# Altium PCB PCB_smart.PcbDoc
Units mm, origin at the board's own origin, x right, y up, seen from the top; angles counter-clockwise.
Board outline 80 x 80 mm, 4 copper layers (Top Layer, Internal Plane 1, Internal Plane 2, Bottom Layer), stack 0.462 mm thick; 30 components, 20 nets, 206 pads, 13 vias.
Unrouted connection lines stored in the file: 81.
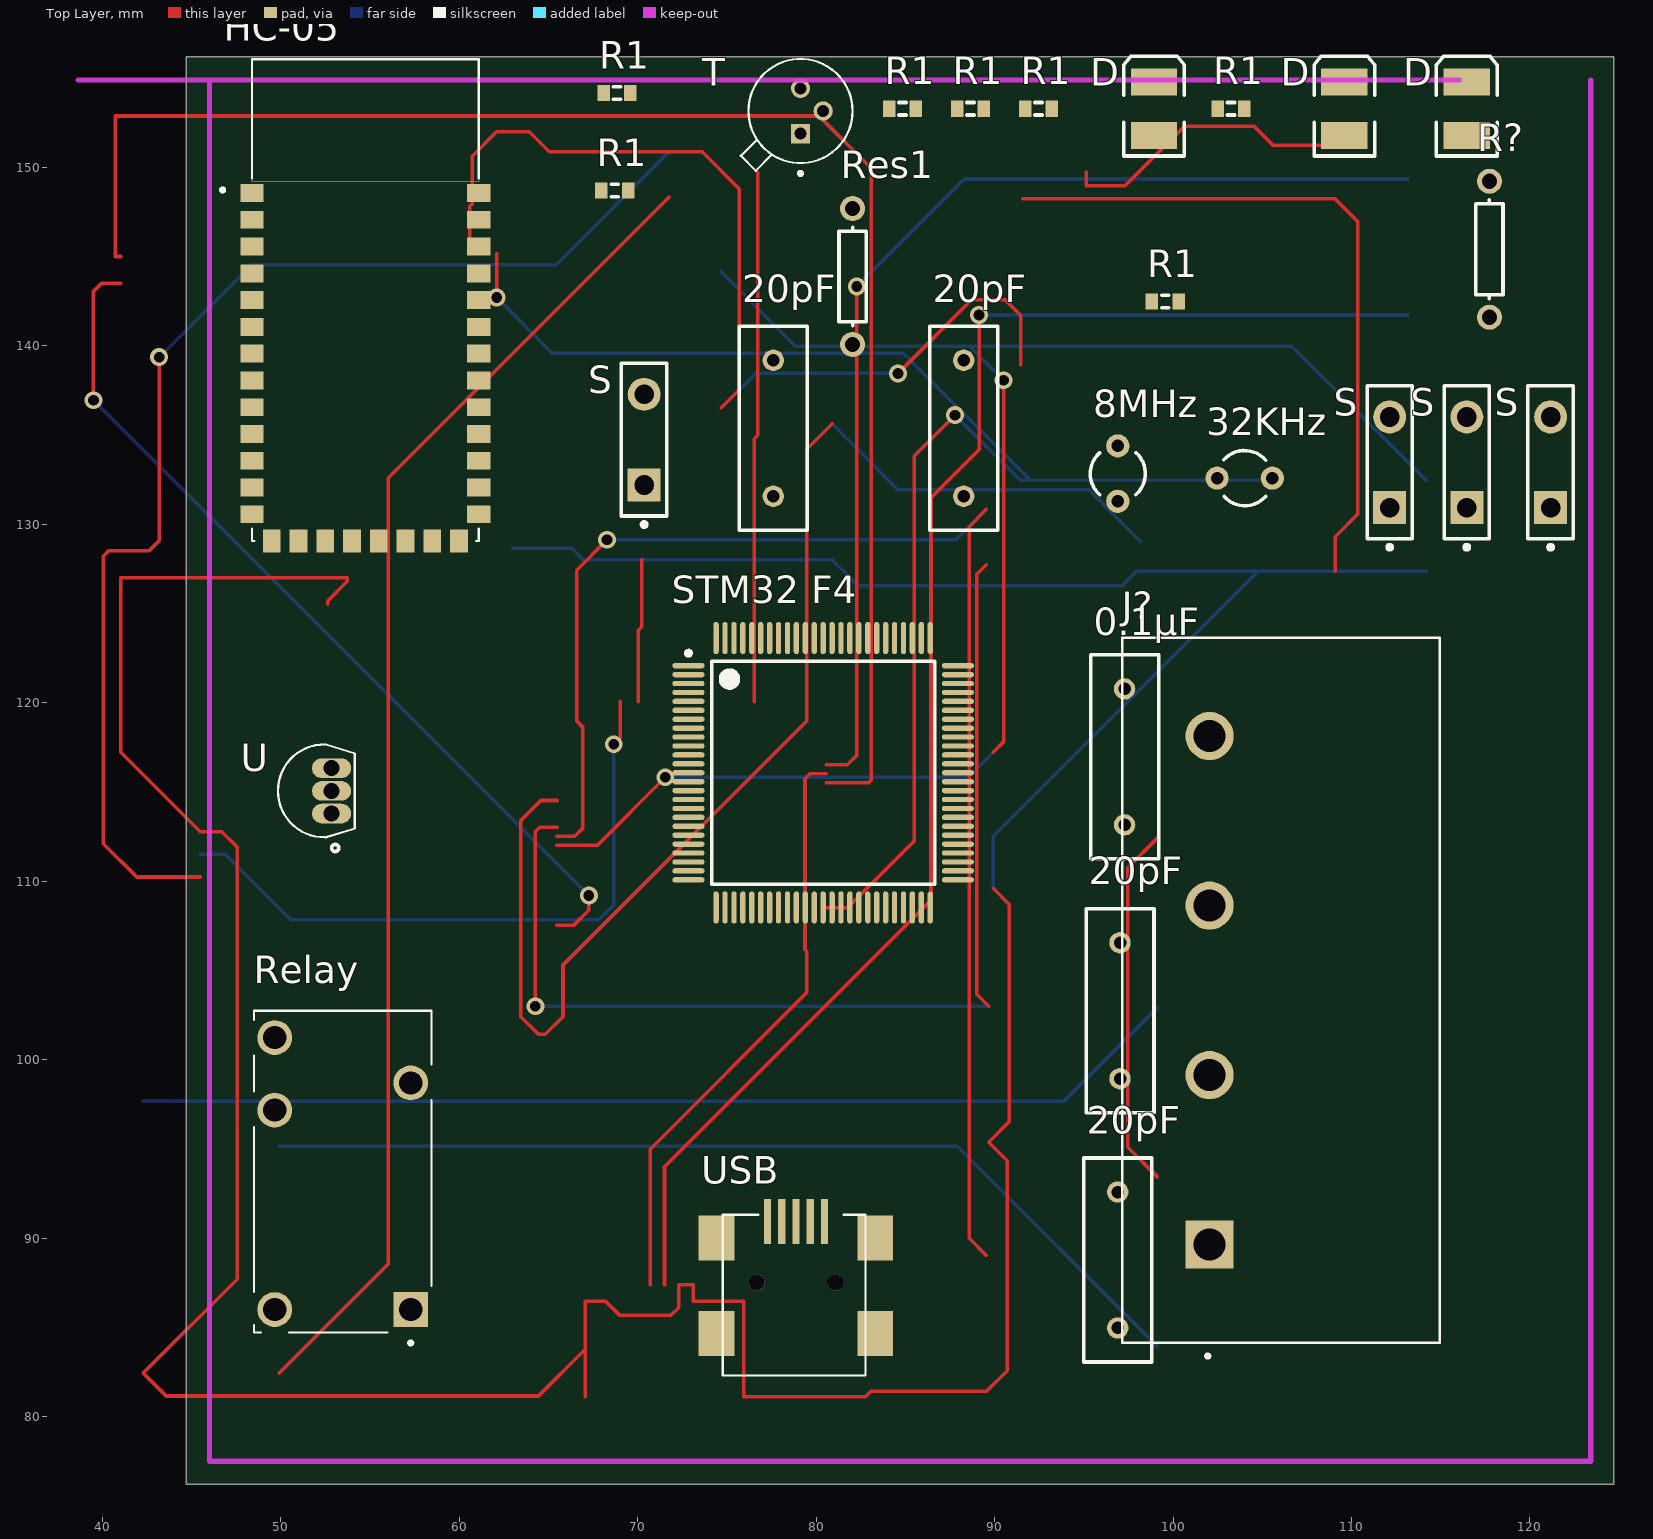
[diagram p0: Top Layer view]
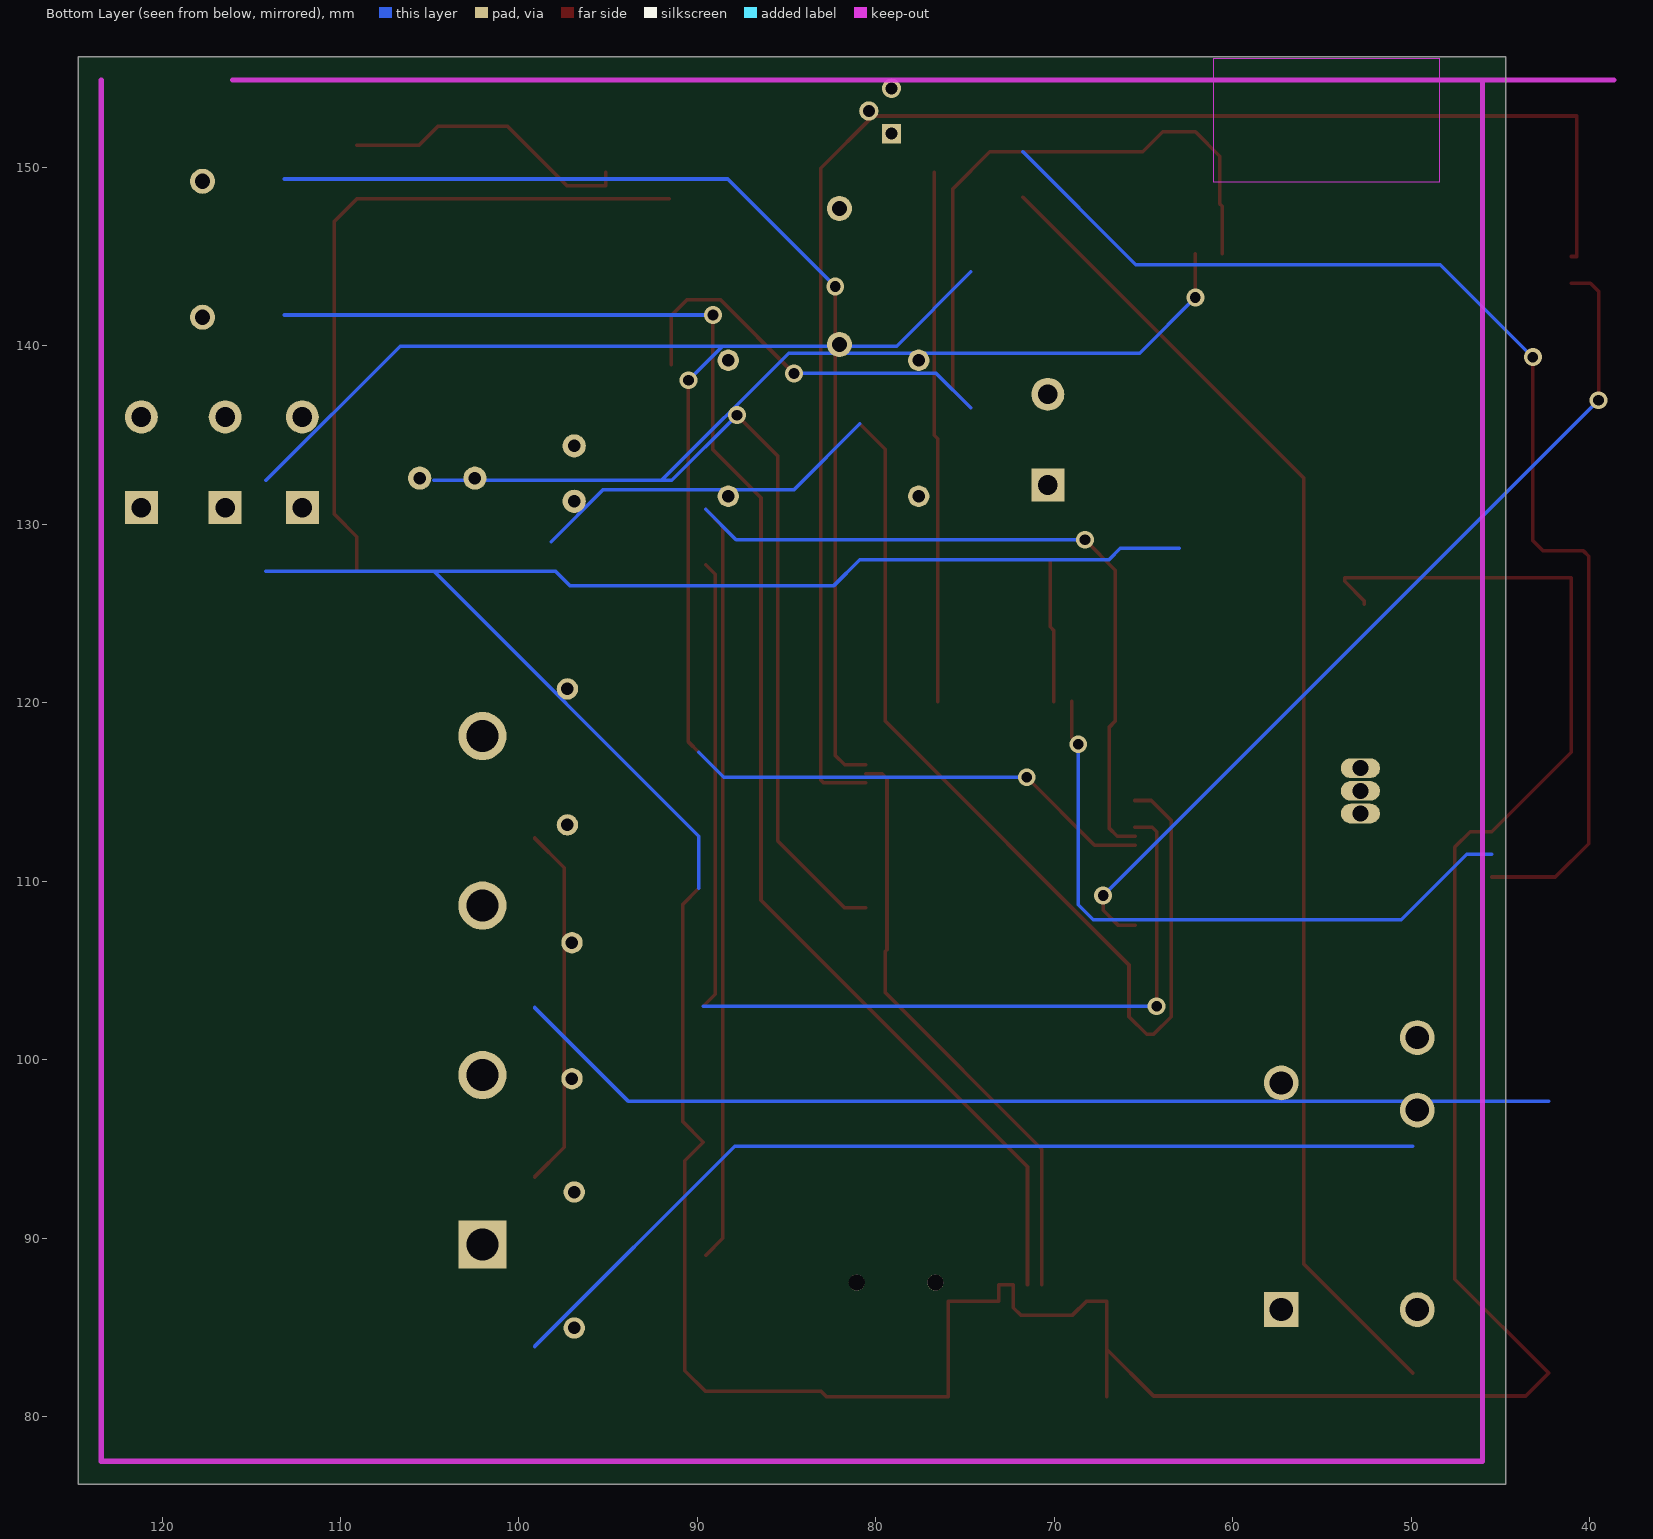
[diagram p1: Bottom Layer view, seen from below]
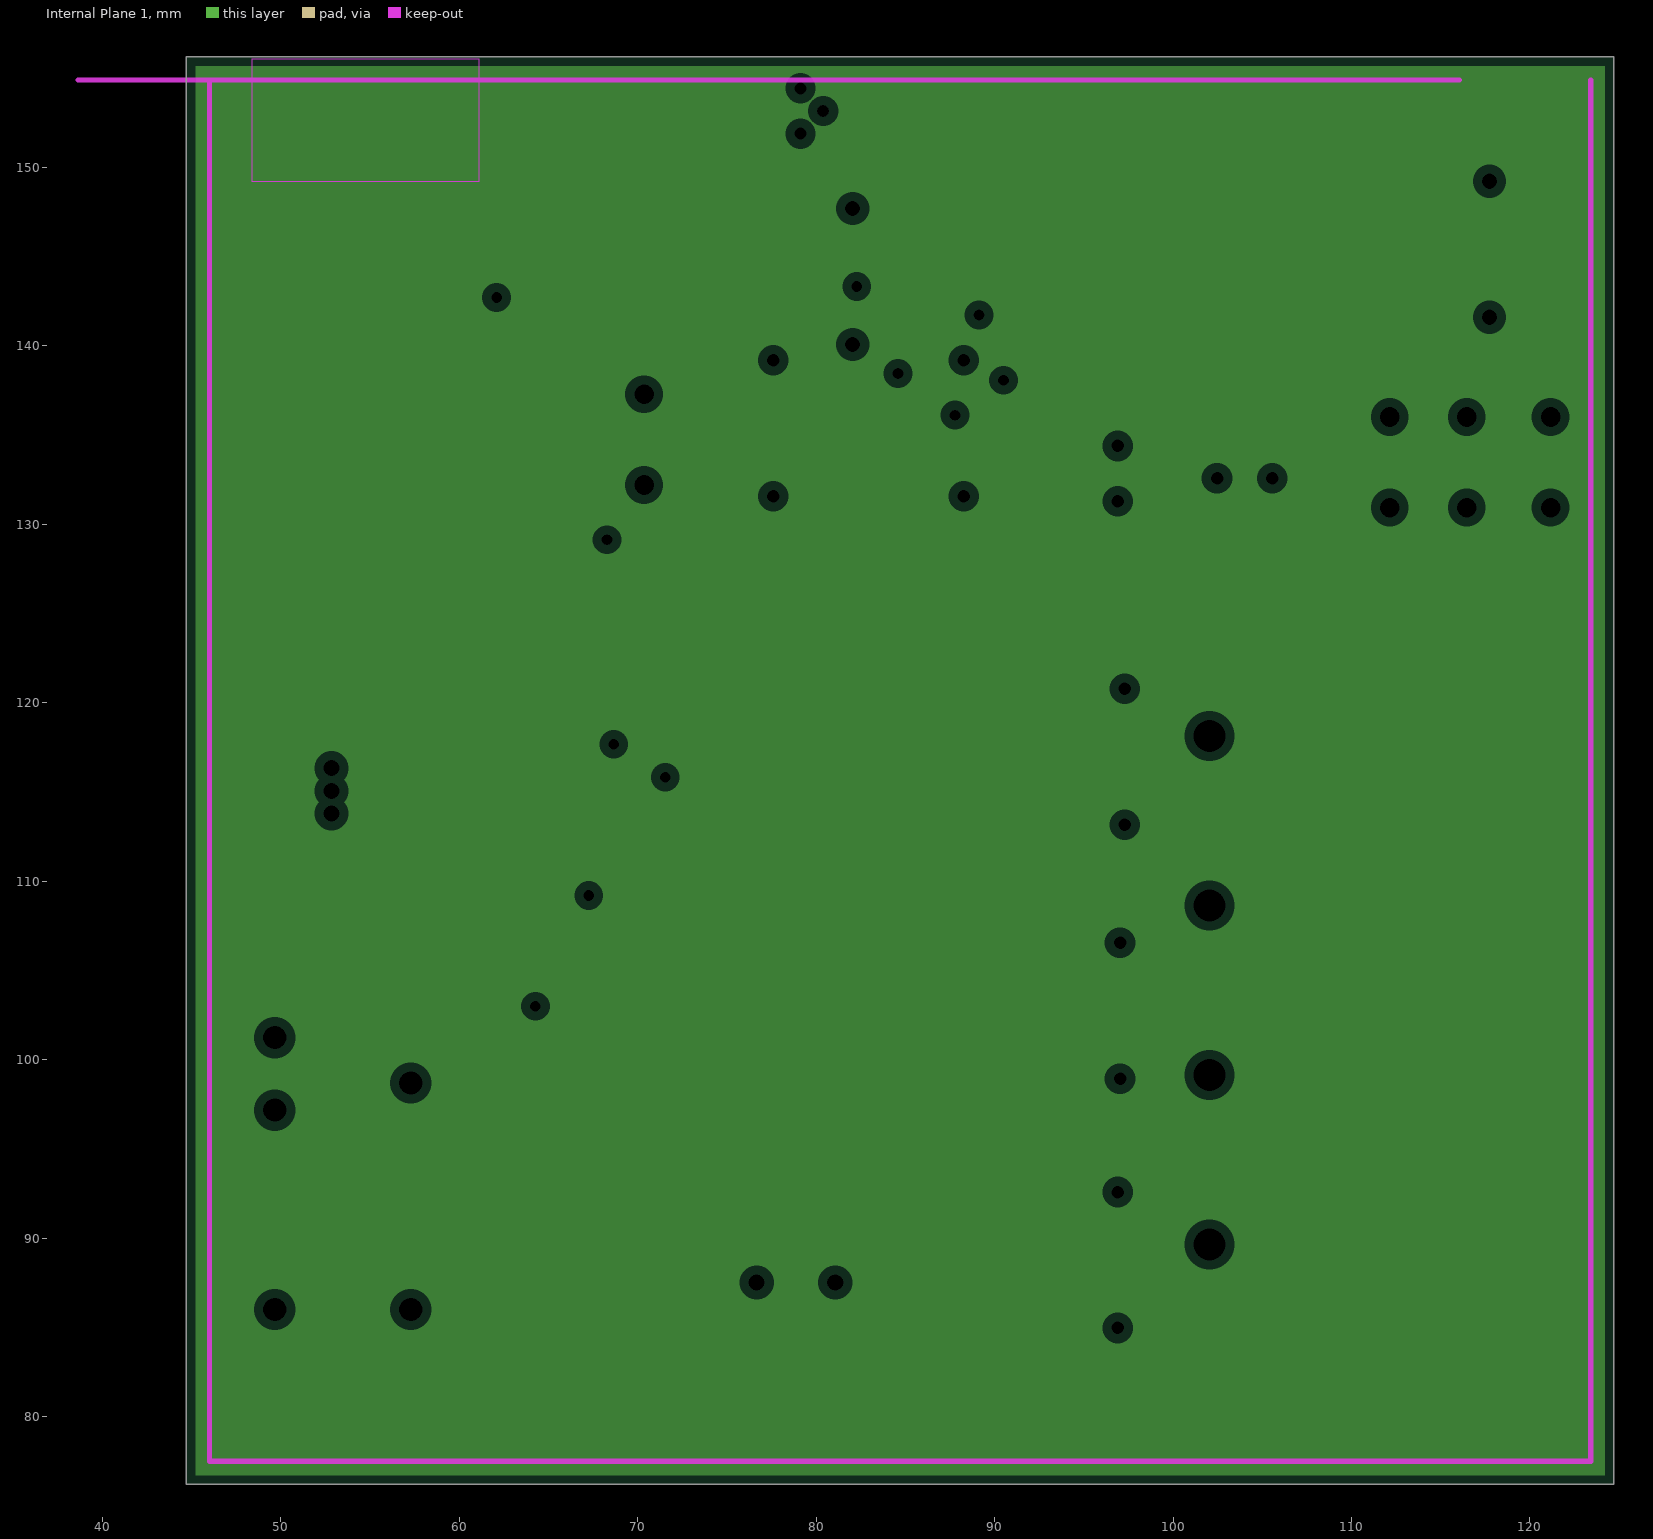
[diagram p2: Internal Plane 1, clearances drawn from the general rule]
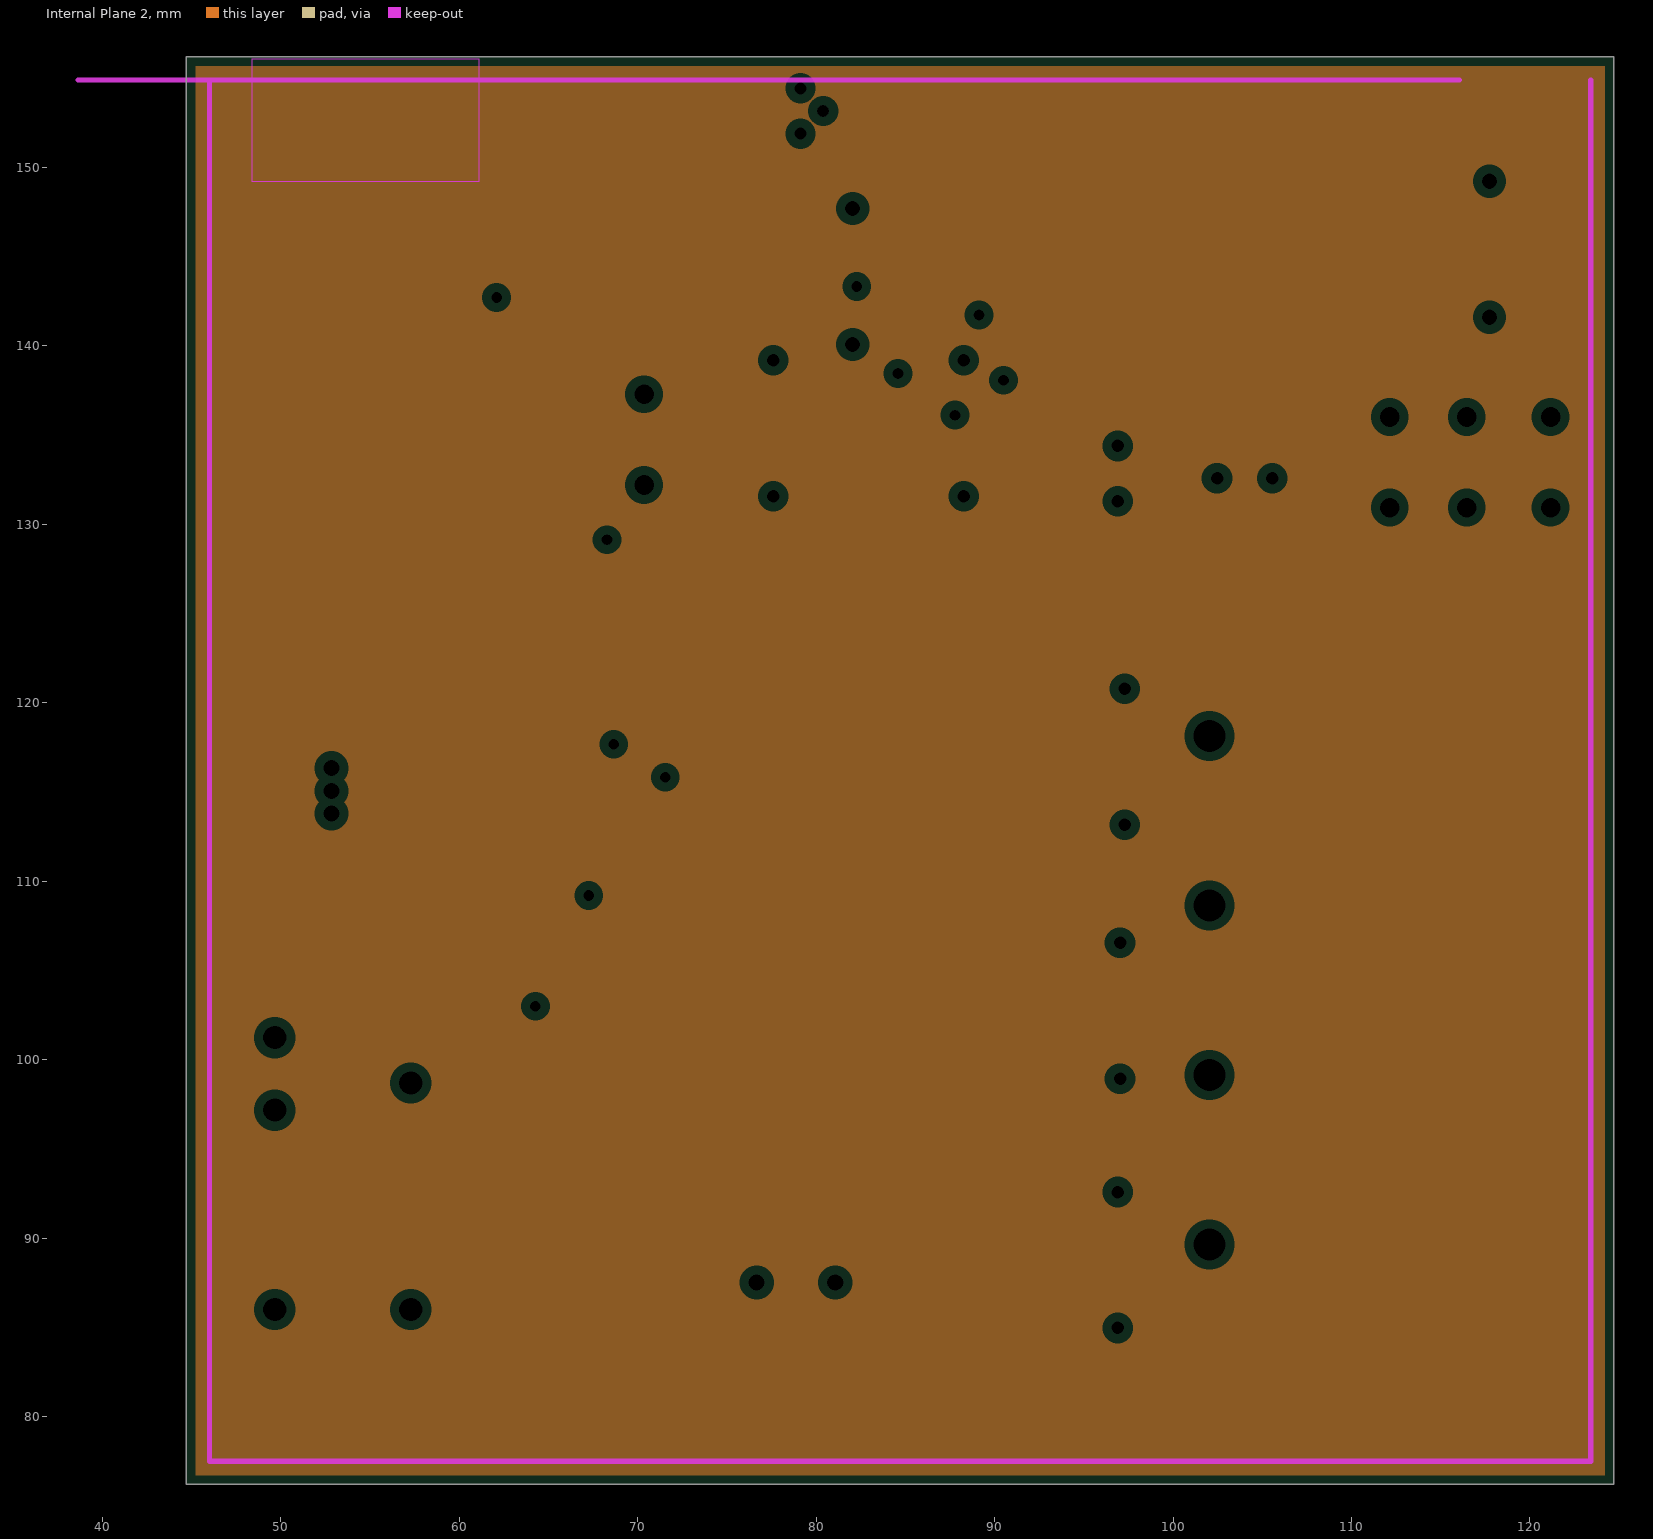
[diagram p3: Internal Plane 2, clearances drawn from the general rule]

## Layer stack, top to bottom
Top Solder: solder mask 0.0102, Solder Resist, Dk 3.5
Top Layer: signal copper 0.0356
Internal Plane 1: plane copper 0.0356
Internal Plane 2: plane copper 0.0356
Dielectric 1: dielectric 0.32, FR-4, Dk 4.8
Bottom Layer: signal copper 0.0356
Bottom Solder: solder mask 0.0102, Solder Resist, Dk 3.5

## Board outline
44.704,76.2 124.704,76.2 124.704,156.2 44.704,156.2

## Design rules (kind name [scope] priority, off if disabled: settings)
Clearance [All] p1: gap=0.2
PlaneClearance [All] p1: clearance=0.508
PlaneConnect [All] p1: planeconnectstyle=Relief reliefexpansion=0.508 reliefentries=4 reliefconductorwidth=0.254 reliefairgap=0.254
PolygonConnect [All] p1: connectstyle=Relief reliefconductorwidth=0.254 reliefentries=4 polygonreliefangle="90 Angle" airgapwidth=0.254
RoutingVias [All] p1: holewidth=0.6 width=1 viastyle="Through Hole" minholewidth=0.711 minwidth=1.27 maxholewidth=0.711 maxwidth=1.27
SolderMaskExpansion [All] p1: expansion=0.102
Width [All] p1: maxlimit=0.2 minlimit=0.2 preferedwidth=0.2
28 further rules are at their usual default settings.

## Classes and differential pairs
component class Sheet1: 0.1µF 8MHz 20pF 32KHz D HC-05 J? R1 R? Relay Res1 S "STM32 F4" T U U? USB

## Components (designator, comment, footprint, x,y, rotation, side; value= is the part's Value field where it differs from the comment)
0.1µF "C" RAD-0.3 97.282,116.967 r90 top
8MHz "XTAL" R38 96.901,132.842 r0 top
20pF "Cap" RAD-0.3 97.028,102.743 r90 top
20pF "Cap" RAD-0.3 96.901,88.773 r90 top
20pF "CL2" RAD-0.3 88.265,135.382 r90 top
20pF "CL1" RAD-0.3 77.597,135.382 r90 top
32KHz "OSCL" R38 104.013,132.588 r90 top
D "LED3" 3.5X2.8X1.9 116.459,153.289 r90 top
D "LED3" 3.5X2.8X1.9 109.601,153.289 r90 top
D "LED3" 3.5X2.8X1.9 98.933,153.289 r90 top
HC-05 "HC-05" XCVR_HC-05 54.737,142.24 r0 top
J? "OSTYK44104030" OST_OSTYK44104030 106.045,103.886 r90 top
R1 "Res3" J1-0603 84.836,153.289 r0 top
R1 "Res3" J1-0603 103.251,153.289 r0 top
R1 "Res3" J1-0603 92.456,153.289 r0 top
R1 "Res3" J1-0603 88.646,153.289 r0 top
R1 "Res3" J1-0603 68.707,148.717 r0 top
R1 "Res3" J1-0603 68.834,154.178 r0 top
R1 "Res3" J1-0603 99.568,142.494 r0 top
R? "R1" AXIAL-0.3 117.729,145.415 r90 top
Relay "J0971CS5VDC.45" RELAY_J0971CS5VDC.45 53.467,93.726 r90 top
Res1 "" AXIAL-0.3 82.042,143.891 r90 top
S "SW-PB" SPST-2 121.158,133.477 r90 top
S "SW-PB" SPST-2 112.141,133.477 r90 top
S "SW-PB" SPST-2 116.459,133.477 r90 top
S "SW-PB" SPST-2 70.358,134.747 r90 top
"STM32 F4" "STM32F407VGT6" STM-LQFP100_N 80.391,116.078 r0 top
T "2N2222" TO127P584H533-3 79.121,153.162 r90 top
U "TMP36GT9" XDCR_TMP36GT9 51.943,115.062 r90 top
USB "USB connector" usb_B 78.867,87.503 r90 top

## Footprints (in the part's own frame and the unit in brackets; to place one, negate y for a bottom-side part, rotate by r counter-clockwise, add the part's x,y. Pads: shape width x height; smd on the part's side, far side on the other; paste and mask are expansions set on the pad)
3.5X2.8X1.9 [mm] "SM LED; 2 C-Bend Leads; Body 3.5 x 2.8 x 1.9 mm, inc leads (LxWxH typ)"
  rect 1.5x2.6 smd: 1(-1.5,0) 2(1.5,0)
  silkscreen extent -2.65,-1.7 2.95,1.7
AXIAL-0.3 [mm] "Axial Device, Thru-Hole; 2 Leads; 0.3 in Pin Spacing"
  round 1.4 hole 0.85: 1(-3.81,0) 2(3.81,0)
  silkscreen extent -2.77,-0.76 2.77,0.76
J1-0603 [mm] "Chip Resistor, Body 1.6x0.8mm, IPC High Density"
  rect 0.7x0.9 smd: 1(-0.75,0) 2(0.75,0)
  silkscreen extent -0.2,-0.35 0.2,0.35, body extent -0.85,-0.48 0.85,0.48, height 0.9
OST_OSTYK44104030 [mm]
  rect 2.7x2.7 hole 1.8: 1(-14.25,4)
  round 2.7 hole 1.8: 2(-4.75,4) 3(4.75,4) 4(14.25,4)
  silkscreen extent -20.6,-8.9 19.75,8.9, body extent -19.75,-12.9 19.75,4.9, height 14.2
R38 [mm] "Crystal, Thru-Hole; 2 Leads; Body 3.1 x 8.2 mm (Dia.xH)"
  round 1.3 hole 0.7: 1(0,1.55) 2(0,-1.55)
  silkscreen extent -1.55,-1.19 1.55,1.17
RAD-0.3 [mm] "Radial Cap, Thru-Hole; 2 Leads; 0.3 in Pin Spacing"
  round 1.2 hole 0.7: 1(-3.81,0) 2(3.81,0)
  silkscreen extent -5.71,-1.91 5.71,1.91
RELAY_J0971CS5VDC.45 [mm]
  round 1.95 hole 1.3: 11(4.97,-3.81) 12(3.446,3.81) 14(7.51,3.81) A2(-7.73,3.81)
  rect 1.95x1.95 / inner round 1.95 / far side rect 1.95x1.95 hole 1.3: A1(-7.73,-3.81)
  silkscreen extent -9.7,-4.97 9.01,4.97, body extent -9.01,-4.97 9.01,4.97, height 15.3
SPST-2 [mm] "Switch; 2 Leads"
  rect 1.85x1.85 hole 1.1: 1(-2.54,0)
  round 1.85 hole 1.1: 2(2.54,0)
  silkscreen extent -4.89,-1.27 4.28,1.27
STM-LQFP100_N [mm] "Thin QFP, 100-Leads, Body 14x14mm, Pitch 0.5mm, IPC Medium Density"
  oval 1.8x0.3 smd: 1(-7.55,6) 2(-7.55,5.5) 3(-7.55,5) 4(-7.55,4.5) 5(-7.55,4) 6(-7.55,3.5) 7(-7.55,3) 8(-7.55,2.5) 9(-7.55,2) 10(-7.55,1.5) 11(-7.55,1) 12(-7.55,0.5) 13(-7.55,0) 14(-7.55,-0.5) 15(-7.55,-1) 16(-7.55,-1.5) 17(-7.55,-2) 18(-7.55,-2.5) 19(-7.55,-3) 20(-7.55,-3.5) 21(-7.55,-4) 22(-7.55,-4.5) 23(-7.55,-5) 24(-7.55,-5.5) 25(-7.55,-6) 51(7.55,-6) 52(7.55,-5.5) 53(7.55,-5) 54(7.55,-4.5) 55(7.55,-4) 56(7.55,-3.5) 57(7.55,-3) 58(7.55,-2.5) 59(7.55,-2) 60(7.55,-1.5) 61(7.55,-1) 62(7.55,-0.5) 63(7.55,0) 64(7.55,0.5) 65(7.55,1) 66(7.55,1.5) 67(7.55,2) 68(7.55,2.5) 69(7.55,3) 70(7.55,3.5) 71(7.55,4) 72(7.55,4.5) 73(7.55,5) 74(7.55,5.5) 75(7.55,6)
  oval 0.3x1.8 smd: 26(-6,-7.55) 27(-5.5,-7.55) 28(-5,-7.55) 29(-4.5,-7.55) 30(-4,-7.55) 31(-3.5,-7.55) 32(-3,-7.55) 33(-2.5,-7.55) 34(-2,-7.55) 35(-1.5,-7.55) 36(-1,-7.55) 37(-0.5,-7.55) 38(0,-7.55) 39(0.5,-7.55) 40(1,-7.55) 41(1.5,-7.55) 42(2,-7.55) 43(2.5,-7.55) 44(3,-7.55) 45(3.5,-7.55) 46(4,-7.55) 47(4.5,-7.55) 48(5,-7.55) 49(5.5,-7.55) 50(6,-7.55) 76(6,7.55) 77(5.5,7.55) 78(5,7.55) 79(4.5,7.55) 80(4,7.55) 81(3.5,7.55) 82(3,7.55) 83(2.5,7.55) 84(2,7.55) 85(1.5,7.55) 86(1,7.55) 87(0.5,7.55) 88(0,7.55) 89(-0.5,7.55) 90(-1,7.55) 91(-1.5,7.55) 92(-2,7.55) 93(-2.5,7.55) 94(-3,7.55) 95(-3.5,7.55) 96(-4,7.55) 97(-4.5,7.55) 98(-5,7.55) 99(-5.5,7.55) 100(-6,7.55)
  silkscreen extent -7.67,-6.25 6.25,6.82, body extent -7,-7 7,7, height 1.6
TO127P584H533-3 [mm]
  rect 1.08x1.08 / inner round 1.08 / far side rect 1.08x1.08 hole 0.68: 1(-1.27,0)
  round 1.08 hole 0.68: 2(0,-1.27) 3(1.27,0)
  silkscreen extent -3.6,-2.92 2.92,3.34, body extent -3.27,-2.9 2.9,3.27, height 18
usb_B [mm]
  rect 2.5x2 smd: 0(-2.848,4.45) 0(-2.848,-4.45) 0(2.502,4.45) 0(2.502,-4.45)
  rect 2.5x0.4 smd: 1(3.427,1.6) 2(3.427,0.8) 3(3.427,0) 4(3.427,-0.8) 5(3.427,-1.6)
  round 0.9 hole 0.9 unplated: 6(0.002,2.2) 6(0.002,-2.2)
  silkscreen extent -5.2,-3.9 3.8,4.1, body extent -5.84,-4.95 3.16,4.95, height 3.96
XCVR_HC-05 [mm]
  rect 1.3x1 smd: 1(-6.35,6.325) 2(-6.35,4.825) 3(-6.35,3.325) 4(-6.35,1.825) 5(-6.35,0.325) 6(-6.35,-1.175) 7(-6.35,-2.675) 8(-6.35,-4.175) 9(-6.35,-5.675) 10(-6.35,-7.175) 11(-6.35,-8.675) 12(-6.35,-10.175) 13(-6.35,-11.675) 22(6.35,-11.675) 23(6.35,-10.175) 24(6.35,-8.675) 25(6.35,-7.175) 26(6.35,-5.675) 27(6.35,-4.175) 28(6.35,-2.675) 29(6.35,-1.175) 30(6.35,0.325) 31(6.35,1.825) 32(6.35,3.325) 33(6.35,4.825) 34(6.35,6.325)
  rect 1x1.3 smd: 14(-5.25,-13.175) 15(-3.75,-13.175) 16(-2.25,-13.175) 17(-0.75,-13.175) 18(0.75,-13.175) 19(2.25,-13.175) 20(3.75,-13.175) 21(5.25,-13.175)
  Keep-Out Layer region: 6.35,6.95 -6.35,6.95 -6.35,13.85 6.35,13.85
  Keep-Out Layer region: 6.35,6.95 -6.35,6.95 -6.35,13.85 6.35,13.85
  silkscreen extent -8.1,-13.17 6.35,13.83
XDCR_TMP36GT9 [mm]
  oval 1.1x2.2 hole 0.9: 1(-1.27,-0.9) 2(0,-0.9) 3(1.27,-0.9)
  silkscreen extent -3.4,-2.2 2.6,2.11

## Part data
0.1µF 20pF 20pF: library part Cap, "Capacitor"
8MHz: "Crystal Oscillator"
20pF 20pF: "Capacitor"
32KHz: library part XTAL, "Crystal Oscillator"
D D D: "Typical BLUE SiC LED"
HC-05: "Bluetooth to Serial Port Module"
J?: "4 Circuit 0.374 (9.50mm) Barrier Block Connector, Screws with Captive Plate"
R1 R1 R1 R1 R1 R1 R1: "Resistor"
R? Res1: library part Res1, "Resistor"
Relay: "General Purpose Relay SPDT (1 Form C) 5VDC Coil Through Hole"
S S S S: "Switch"
"STM32 F4": "ARM Cortex-M4 32-bit MCU+FPU, 210 DMIPS, 1024 kB Flash, 192 kB Internal RAM, 82 I/Os, 100-pin LQFP, -40 to 85 degC, Tray"
T: "Bipolar (BJT) Transistor NPN 50V 800mA 300mW Surface Mount Ceramic SMD"
U: "Temperature Sensor Analog, Local -40°C ~ 125°C 10mV/°C TO-92-3"
USB: library part USB-B, "USB-B"

## Via types
v1: diameter 1, hole 0.6, Top Layer to Bottom Layer, 13 vias

## Nets (pads, with @x,y where several pads share a name; then routed paths per layer and width w, separated by ;. In a path a pad name is that pad's centre, name@x,y a point inside that pad or via, vN(x,y) a via of type N, cw(c..) or ccw(c..) an arc to the next point about the centre after c; other vN are vias at no path point)
5V: USB.1
GND: 0.1µF.1 20pF.1 "STM32 F4.94" D.1 HC-05.13 HC-05.21 HC-05.22 Relay.A2 S.1 U.3 USB.0 USB.4 USB.5 | length 280.9
  Top Layer w0.2: 52.621,125.509 52.621,125.705 53.721,126.805 53.721,127.009 41.021,127.009 41.021,117.232 45.477,112.776 46.685,112.776 47.549,111.912 47.549,87.698 42.291,82.44 43.578,81.153 64.435,81.153 67.051,83.769 ; 67.051,81.099 67.051,83.769 ; 70.025,120.072 70.025,124.054 70.231,124.26 70.231,128.016 ; 89.916,109.601 90.83,108.687 90.83,96.545 89.662,95.377 90.703,94.336 90.703,82.575 89.535,81.407 83.061,81.407 82.753,81.099 75.951,81.099 75.951,86.449 73.101,86.449 73.101,87.374 72.301,87.374 72.301,86.106 71.882,85.687 68.974,85.687 68.212,86.449 67.051,86.449 67.051,83.769 ; 91.567,148.233 102.235,148.233 109.093,148.233 110.338,146.988 110.338,130.556 109.093,129.311 109.093,127.381
  Bottom Layer w0.2: 62.992,128.651 66.294,128.651 66.929,128.016 70.231,128.016 80.899,128.016 82.347,126.568 97.155,126.568 97.968,127.381 104.775,127.381 ; 89.916,109.601 89.916,112.522 104.775,127.381 ; 114.173,127.381 109.093,127.381 104.775,127.381
Net0.1µF_2: 0.1µF.2 "STM32 F4.14" Res1.2 S.2@121.158,136.017 | length 94.7
  Top Layer w0.2: 65.475,112.022 67.742,112.022 v1(71.544,115.824) ; 89.916,117.221 90.5,117.805 v1(90.5,138.074)
  Bottom Layer w0.2: v1(71.544,115.824) 88.519,115.824 89.916,117.221 ; 74.676,144.145 78.835,139.986 88.589,139.986 ; v1(90.5,138.074) 88.589,139.986 ; 114.173,132.461 106.648,139.986 88.589,139.986
Net8MHz_1: 8MHz.1 20pF.2@96.901,92.583 "STM32 F4.13" | length 83.2
  Top Layer w0.2: 65.475,112.522 66.472,112.522 66.929,112.979 66.929,118.618 66.573,118.974 66.573,127.432 v1(68.275,129.134) ; 89.535,89.027 88.57,89.992 88.57,129.871 89.535,130.836
  Bottom Layer w0.2: v1(68.275,129.134) 87.833,129.134 89.535,130.836
Net8MHz_2: 8MHz.2 20pF.2@97.028,106.553 "STM32 F4.12" | length 61.7
  Top Layer w0.2: v1(64.262,102.997) 64.262,112.776 64.508,113.022 65.475,113.022 ; 89.535,127.736 89.002,127.203 89.002,103.657 89.662,102.997
  Bottom Layer w0.2: v1(64.262,102.997) 89.662,102.997
Net20pF_2: 20pF.2@77.597,139.192 32KHz.1 "STM32 F4.8"
Net20pF_2: 20pF.2@88.265,139.192 32KHz.2 "STM32 F4.9" | length 76.2
  Top Layer w0.2: 65.475,114.522 64.567,114.522 63.449,113.404 63.449,102.413 64.44,101.422 64.821,101.422 65.811,102.413 65.811,105.308 79.477,118.974 79.477,134.214 80.899,135.636
  Bottom Layer w0.2: 80.899,135.636 84.607,131.928 95.301,131.928 98.197,129.032
NetD_2: D.2@116.459,154.789 R1.1@102.501,153.289 | length 16.5
  Top Layer w0.2: 95.135,149.733 95.135,148.971 97.307,148.971 100.635,152.298 104.546,152.298 105.612,151.233 109.093,151.233
NetHC-05_1: "STM32 F4.69" HC-05.1 | length 88.6
  Top Layer w0.2: 41.021,145.009 40.716,145.009 40.716,152.883 80.162,152.883 83.083,149.962 83.083,115.672 82.934,115.522 80.575,115.522
NetHC-05_2: "STM32 F4.23" HC-05.2 | length 50
  Top Layer w0.2: v1(39.497,136.957) 39.497,143.053 39.953,143.509 41.021,143.509 ; 65.475,107.522 66.399,107.522 67.259,108.382 v1(67.259,109.195)
  Bottom Layer w0.2: v1(39.497,136.957) v1(67.259,109.195)
NetJ?_1: J?.1 Relay.11 | length 53.9
  Bottom Layer w0.2: 49.911,95.14 87.905,95.14 99.124,83.921
NetJ?_2: J?.2 J?.4 | length 20.4
  Top Layer w0.2: 99.124,93.421 97.46,95.085 97.46,110.757 99.124,112.421
NetJ?_3: J?.3 Relay.14 | length 59
  Bottom Layer w0.2: 42.291,97.68 93.883,97.68 99.124,102.921
NetR1_1: "STM32 F4.81" R1.1@84.086,153.289 | length 29.7
  Top Layer w0.2: 76.525,120.072 76.525,134.798 76.72,134.993 76.72,149.733
NetR1_2: "STM32 F4.55" R1.2@69.457,148.717 S.2@112.141,136.017 | length 86.4
  Top Layer w0.2: v1(62.091,142.709) 62.091,145.161 ; 80.575,108.522 81.763,108.522 85.496,112.256 85.496,133.833 v1(87.782,136.119)
  Bottom Layer w0.2: v1(62.091,142.709) 65.215,139.586 84.887,139.586 92.011,132.461 ; v1(87.782,136.119) 91.44,132.461 92.011,132.461 ; 104.775,132.461 92.011,132.461
NetR?_1: R?.1 USB.3 | length 85.7
  Top Layer w0.2: 71.501,87.374 71.501,94.005 86.436,108.941 86.436,131.496 89.129,134.188 v1(89.129,141.732)
  Bottom Layer w0.2: v1(89.129,141.732) 113.157,141.732
NetRelay_A1: Relay.A1 T.1 | length 74.9
  Top Layer w0.2: 49.911,82.44 56.007,88.536 56.007,132.588 71.755,148.336
"NetSTM32 F4_70": "STM32 F4.70" USB.2 | length 33.4
  Top Layer w0.2: 70.701,87.374 70.701,94.983 79.477,103.759 79.477,106.07 79.375,106.172 79.375,115.748 79.649,116.022 80.575,116.022
"NetSTM32 F4_96": "STM32 F4.96" U.2 | length 36.6
  Top Layer w0.2: v1(68.656,117.678) 69.025,118.047 69.025,120.072
  Bottom Layer w0.2: 45.477,111.506 46.888,111.506 50.546,107.848 67.818,107.848 68.656,108.687 v1(68.656,117.678)
VCC: "STM32 F4.71" HC-05.12 R1.1@67.957,148.717 R1.1@68.084,154.178 R1.1@98.818,142.494 R?.2 Res1.1 T.3 U.1 | length 188.5
  Top Layer w0.2: v1(43.18,139.37) 43.18,129.093 42.596,128.509 41.021,128.509 40.346,128.509 40.056,128.219 40.056,112.099 41.919,110.236 45.477,110.236 ; 60.591,145.161 60.591,147.828 60.718,147.955 60.718,150.622 62.09,151.994 63.918,151.994 65.036,150.876 71.755,150.876 73.609,150.876 75.692,148.793 75.692,137.541 74.676,136.525 ; 80.575,116.522 81.749,116.522 82.271,117.043 v1(82.271,143.332) ; v1(84.582,138.455) 88.722,142.596 90.576,142.596 91.452,141.72 91.452,138.938
  Bottom Layer w0.2: v1(43.18,139.37) 48.362,144.551 65.43,144.551 71.755,150.876 ; 74.676,136.525 76.606,138.455 v1(84.582,138.455) ; v1(82.271,143.332) 88.29,149.352 113.157,149.352
pads on no net: "STM32 F4.1" "STM32 F4.2" "STM32 F4.3" "STM32 F4.4" "STM32 F4.5" "STM32 F4.6" "STM32 F4.7" "STM32 F4.10" "STM32 F4.11" "STM32 F4.15" "STM32 F4.16" "STM32 F4.17" "STM32 F4.18" "STM32 F4.19" "STM32 F4.20" "STM32 F4.21" "STM32 F4.22" "STM32 F4.24" "STM32 F4.25" "STM32 F4.26" "STM32 F4.27" "STM32 F4.28" "STM32 F4.29" "STM32 F4.30" "STM32 F4.31" "STM32 F4.32" "STM32 F4.33" "STM32 F4.34" "STM32 F4.35" "STM32 F4.36" "STM32 F4.37" "STM32 F4.38" "STM32 F4.39" "STM32 F4.40" "STM32 F4.41" "STM32 F4.42" "STM32 F4.43" "STM32 F4.44" "STM32 F4.45" "STM32 F4.46" "STM32 F4.47" "STM32 F4.48" "STM32 F4.49" "STM32 F4.50" "STM32 F4.51" "STM32 F4.52" "STM32 F4.53" "STM32 F4.54" "STM32 F4.56" "STM32 F4.57" "STM32 F4.58" "STM32 F4.59" "STM32 F4.60" "STM32 F4.61" "STM32 F4.62" "STM32 F4.63" "STM32 F4.64" "STM32 F4.65" "STM32 F4.66" "STM32 F4.67" "STM32 F4.68" "STM32 F4.72" "STM32 F4.73" "STM32 F4.74" "STM32 F4.75" "STM32 F4.76" "STM32 F4.77" "STM32 F4.78" "STM32 F4.79" "STM32 F4.80" "STM32 F4.82" "STM32 F4.83" "STM32 F4.84" "STM32 F4.85" "STM32 F4.86" "STM32 F4.87" "STM32 F4.88" "STM32 F4.89" "STM32 F4.90" "STM32 F4.91" "STM32 F4.92" "STM32 F4.93" "STM32 F4.95" "STM32 F4.97" "STM32 F4.98" "STM32 F4.99" "STM32 F4.100" D.2@98.933,154.789 D.2@109.601,154.789 HC-05.3 HC-05.4 HC-05.5 HC-05.6 HC-05.7 HC-05.8 HC-05.9 HC-05.10 HC-05.11 HC-05.14 HC-05.15 HC-05.16 HC-05.17 HC-05.18 HC-05.19 HC-05.20 HC-05.23 HC-05.24 HC-05.25 HC-05.26 HC-05.27 HC-05.28 HC-05.29 HC-05.30 HC-05.31 HC-05.32 HC-05.33 HC-05.34 R1.1@87.896,153.289 R1.1@91.706,153.289 R1.2@69.584,154.178 R1.2@85.586,153.289 R1.2@89.396,153.289 R1.2@93.206,153.289 R1.2@100.318,142.494 R1.2@104.001,153.289 Relay.12 S.2@70.358,137.287 S.2@116.459,136.017 T.2 USB.6

## Keep-outs
Keep-Out Layer:
  lines w0.3: 38.638,154.9 116.038,154.9 ; 46.004,154.9 46.004,77.5 123.404,77.5 123.404,154.9

## Silkscreen, mask and mechanical layers (free items; w line width, h text height)
Drill Drawing:
  text "HDfixi design" at 62.357,96.52 h1.52

## Dimensions
46.004,77.5 to 46.004,154.9 on Mechanical 1
46.004,77.5 to 123.404,77.5 on Mechanical 1